# EAGLE board tasiyici (EAGLE 9.6.2)
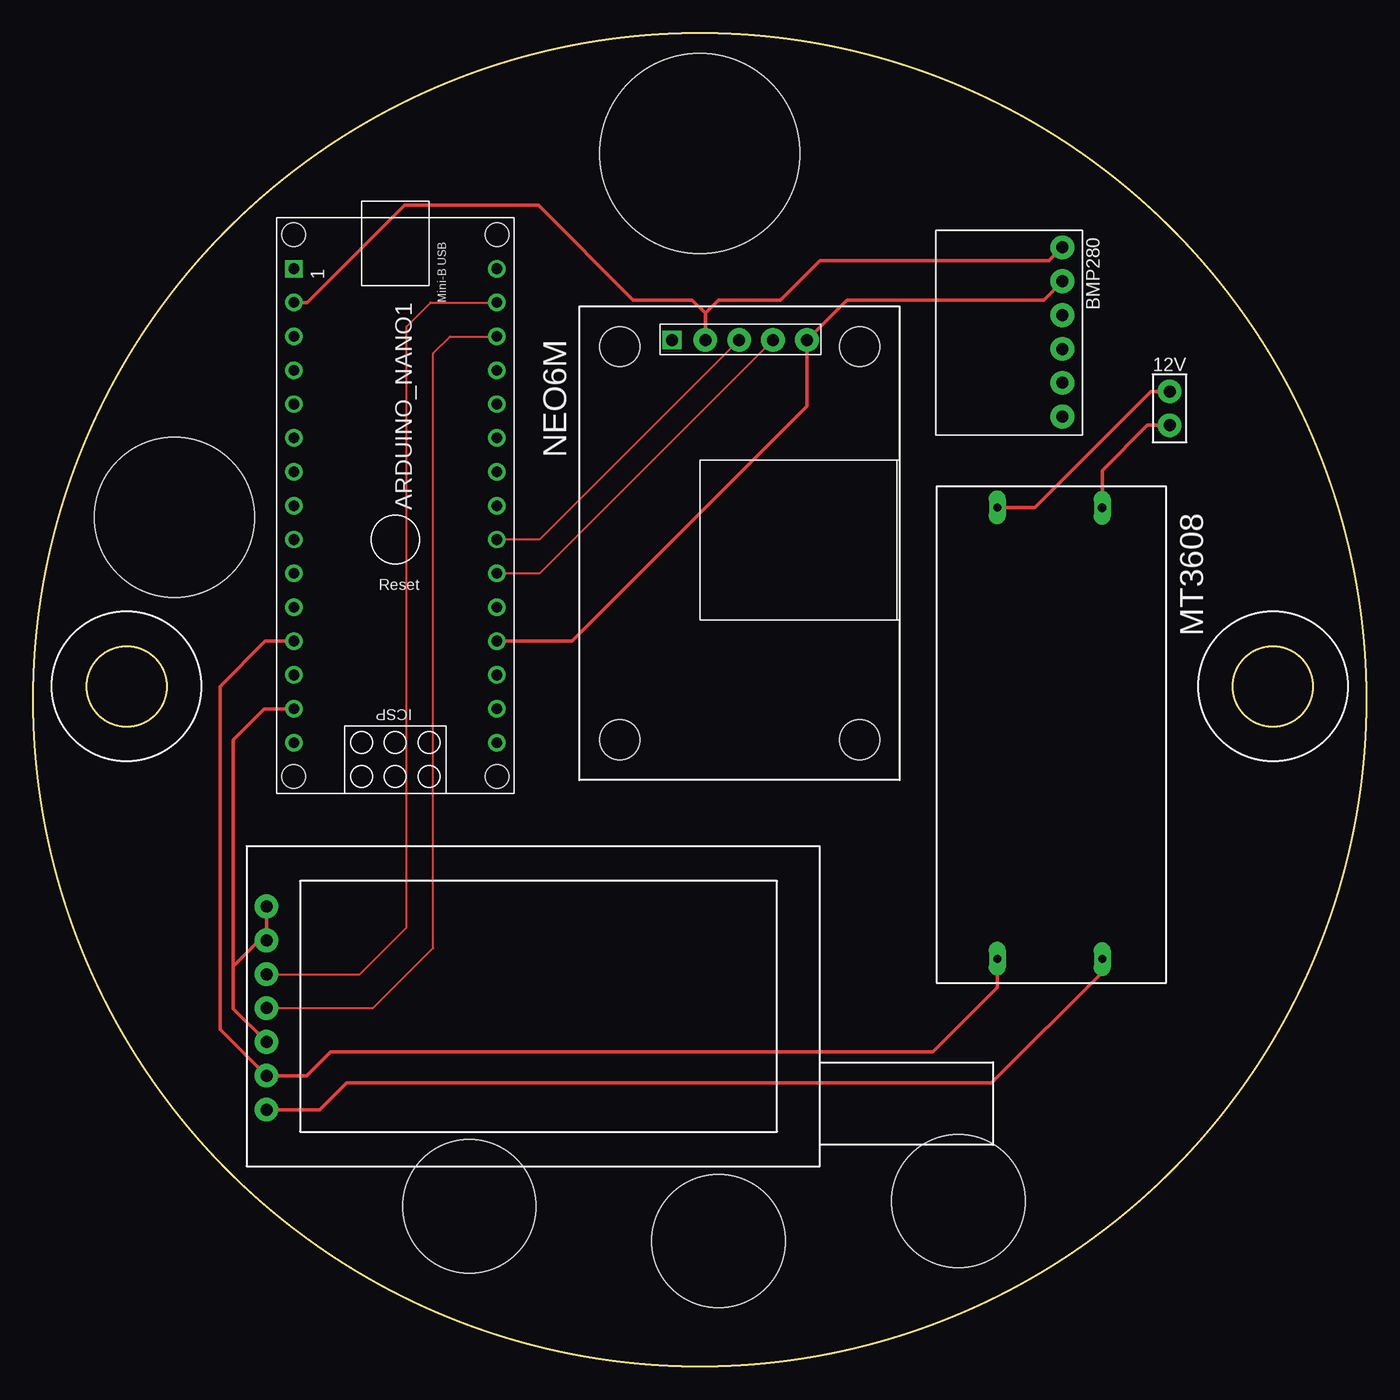
[diagram p0: board, top side]
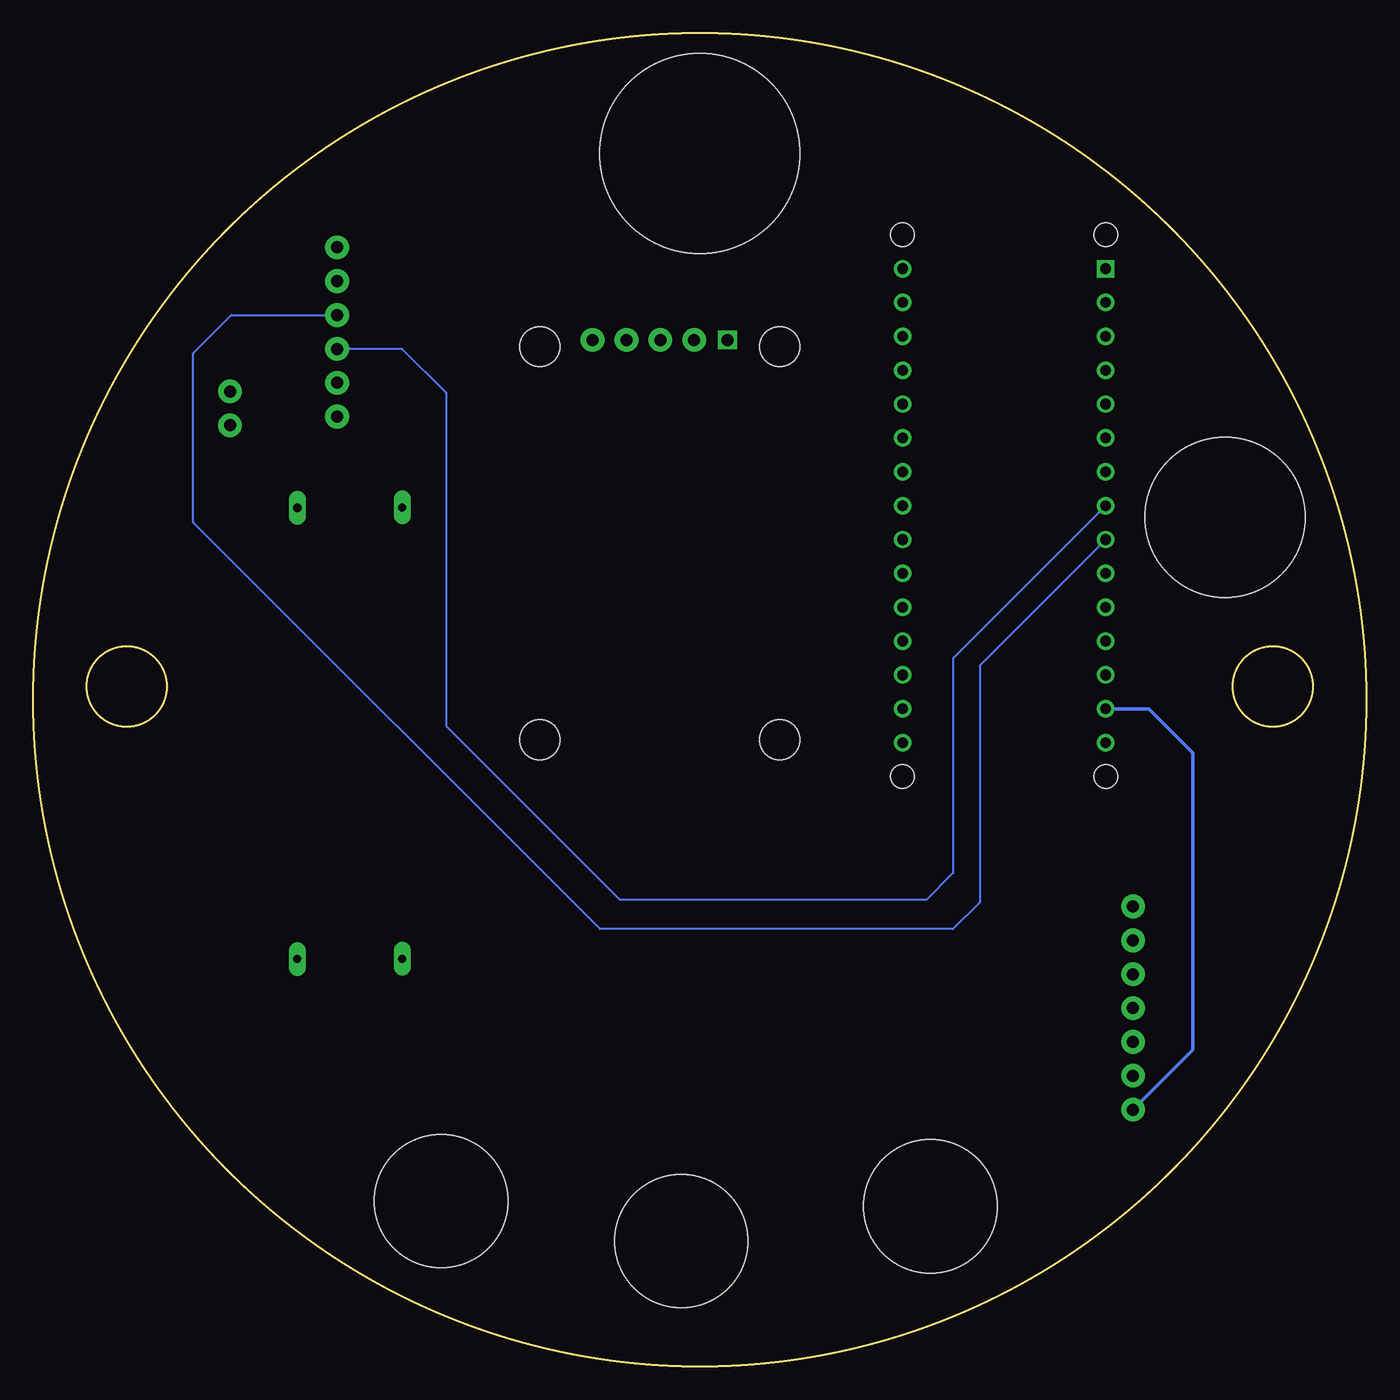
[diagram p1: board, bottom side, seen from below]

Size 100 x 100 mm. Coordinates in mm from the lower left corner, seen from the top.
Outline: circle at 50,50 radius 50
Outline: circle at 93,51 radius 3
Outline: circle at 7,51 radius 3
Copper layers (1*16): Top 0.035mm / dielectric 1.5mm / Bottom 0.035mm
Design rules "default": minimum track width 6mil, minimum drill 0.35mm, track to track 6mil, track to pad 6mil, pad to pad 6mil, via to via 6mil, smd to smd 6mil, copper to edge 40mil, drill to drill 6mil, minimum pad ring 10mil, minimum via ring 8mil, stop-mask expansion 4mil, vias tented up to drill 0mil, thermal gap 10mil
Holes 15 mm at 50,91
Holes 12 mm at 10.6,63.7
Holes 10 mm at 51.4,9.4 32.7,12 69.4,12.4

## Footprints (pad centres in the part's own frame; a part is rotated, then mirrored left to right if it is on the bottom)
ARDUINO_NANO = drill 0.8 square: 1 -20.32,-7.62 | drill 0.8: 2 -17.78,-7.62; 3 -15.24,-7.62; 4 -12.7,-7.62; 5 -10.16,-7.62; 6 -7.62,-7.62; 7 -5.08,-7.62; 8 -2.54,-7.62; 9 0,-7.62; 10 2.54,-7.62; 11 5.08,-7.62; 12 7.62,-7.62; 13 10.16,-7.62; 14 12.7,-7.62; 15 15.24,-7.62; 16 15.24,7.62; 17 12.7,7.62; 18 10.16,7.62; 19 7.62,7.62; 20 5.08,7.62; 21 2.54,7.62; 22 0,7.62; 23 -2.54,7.62; 24 -5.08,7.62; 25 -7.62,7.62; 26 -10.16,7.62; 27 -12.7,7.62; 28 -15.24,7.62; 29 -17.78,7.62; 30 -20.32,7.62 | hole 1.778: -22.86,-7.62; -22.86,7.62; 17.78,7.62; 17.78,-7.62
BMP280 = drill 0.9 pad 1.778: CSB 3.81,3.81; GND -3.81,3.81; SCL -1.27,3.81; SDA 1.27,3.81; SDD 6.35,3.81; VCC -6.35,3.81
12V = drill 0.9 pad 1.778: 12V 0,1.27; GND 0,-1.27
LORAFULLSIZE = drill 0.9 pad 1.778: AUX -10.51,-3.67; GND -10.51,-8.75; M0 -10.51,6.49; M1 -10.51,3.95; RX -10.51,1.41; TX -10.51,-1.13; VCC -10.51,-6.21
MT3608_REGULATOR = drill 0.6 pad 1.27 long: VIN+ -3.43,-7.67; VOUT+ 30.43,-7.67; VOUT- 30.45,0.19 | drill 0.65 pad 1.27 long: VIN- -3.41,0.19
NEO6M = drill 0.9 pad 1.778: GND 0,-7.04; RX 0,-1.96; TX 0,-4.5; VCC 0,0.58 | drill 0.9 pad 1.422 square: P$1 0,3.08 | hole 3: -0.5,-11; -30,-11; -30,7; -0.5,7

## Placement (x,y rotation side)
ARDUINO_NANO1  [ARDUINO_NANO]  27.16,62.02 270 top
BMP1  BMP280  [BMP280]  73.4,77.59 270 top
U$1  12V  [12V]  85.25,71.86 0 top
U$2  LORAFULLSIZE  [LORAFULLSIZE]  28,28 0 top
U$3  MT3608_REGULATOR  [MT3608_REGULATOR]  80,61 270 top
U$4  NEO6M  [NEO6M]  51,77 90 top

## Library data of the parts
ARDUINO_NANO1 = ArduinoNanoV30
BMP1 U$1 = SpatiumB
U$2-U$4 = SpatMuy2022

## Nets
3.7V: U$1.12V U$3.VIN+
3GND: ARDUINO_NANO1.19 BMP1.GND U$4.GND
3V3: ARDUINO_NANO1.2 BMP1.VCC U$4.VCC
5GND: ARDUINO_NANO1.14 U$2.AUX U$2.GND U$2.M0 U$2.M1 U$3.VOUT-
5V: ARDUINO_NANO1.12 U$2.VCC U$3.VOUT+
A4: ARDUINO_NANO1.8 BMP1.SDA
A5: ARDUINO_NANO1.9 BMP1.SCL
D3: ARDUINO_NANO1.21 U$4.TX
D4: ARDUINO_NANO1.22 U$4.RX
D10: ARDUINO_NANO1.28 U$2.TX
D11: ARDUINO_NANO1.29 U$2.RX
PGND: U$1.GND U$3.VIN-
VIN: ARDUINO_NANO1.15

## Tracks (layer width: path | path; a pad name or v marks a point on that pad's centre or on a via)
3.7V
  Top 0.254: U$1.12V 83.83,73.13 75.13,64.43 U$3.VIN+
3GND
  Top 0.254: BMP1.GND 75.81,80 61.04,80 U$4.GND 58.04,72.04 40.4,54.4 ARDUINO_NANO1.19
3V3
  Top 0.254: BMP1.VCC 76.21,82.94 59,82.94 56.06,80 51.42,80 50.42,79 | 50.42,78.42 U$4.VCC 50.42,79 | 50.42,79 49.42,80 45,80 37.9,87.1 27.84,87.1 20.54,79.8 ARDUINO_NANO1.2
5GND
  Top 0.254: U$3.VOUT- 80.19,29.55 71.89,21.25 23.49,21.25 21.49,19.25 U$2.GND | U$2.AUX 15,26.82 15,30 | 19.32,49.32 ARDUINO_NANO1.14 17.32,49.32 15,47 15,30 | U$2.M0 U$2.M1 16.95,31.95 15,30
  Bottom 0.254: U$2.GND 13,23.74 13,46 16.32,49.32 ARDUINO_NANO1.14
5V
  Top 0.254: U$3.VOUT+ 72.33,28.43 67.5,23.6 22.3,23.6 20.49,21.79 U$2.VCC 14,25.28 14,51 17.4,54.4 ARDUINO_NANO1.12
A4
  Bottom 0.152: ARDUINO_NANO1.8 31,53.1 31,37 33,35 56,35 69,48 69,73 72.32,76.32 BMP1.SDA
A5
  Bottom 0.152: ARDUINO_NANO1.9 29,52.56 29,34.8 31,32.8 57.5,32.8 88,63.3 88,76 85.14,78.86 BMP1.SCL
D3
  Top 0.152: U$4.TX 37.98,59.48 ARDUINO_NANO1.21
D4
  Top 0.152: U$4.RX 37.98,62.02 ARDUINO_NANO1.22
D10
  Top 0.152: U$2.TX 25.49,26.87 30,31.38 30,76 31.26,77.26 ARDUINO_NANO1.28
D11
  Top 0.152: U$2.RX 24.49,29.41 28,32.92 28,78 29.8,79.8 ARDUINO_NANO1.29
PGND
  Top 0.254: U$1.GND 83.59,70.59 80.19,67.19 U$3.VIN-